# Altium PCB EC800M AUDIO V1.1.PcbDoc
Units mm, origin at the board's own origin, x right, y up, seen from the top; angles counter-clockwise.
Board outline 37.9 x 35.8 mm, 2 copper layers (Top Layer, Bottom Layer), stack 1.671 mm thick; 102 components, 74 nets, 360 pads, 245 vias.
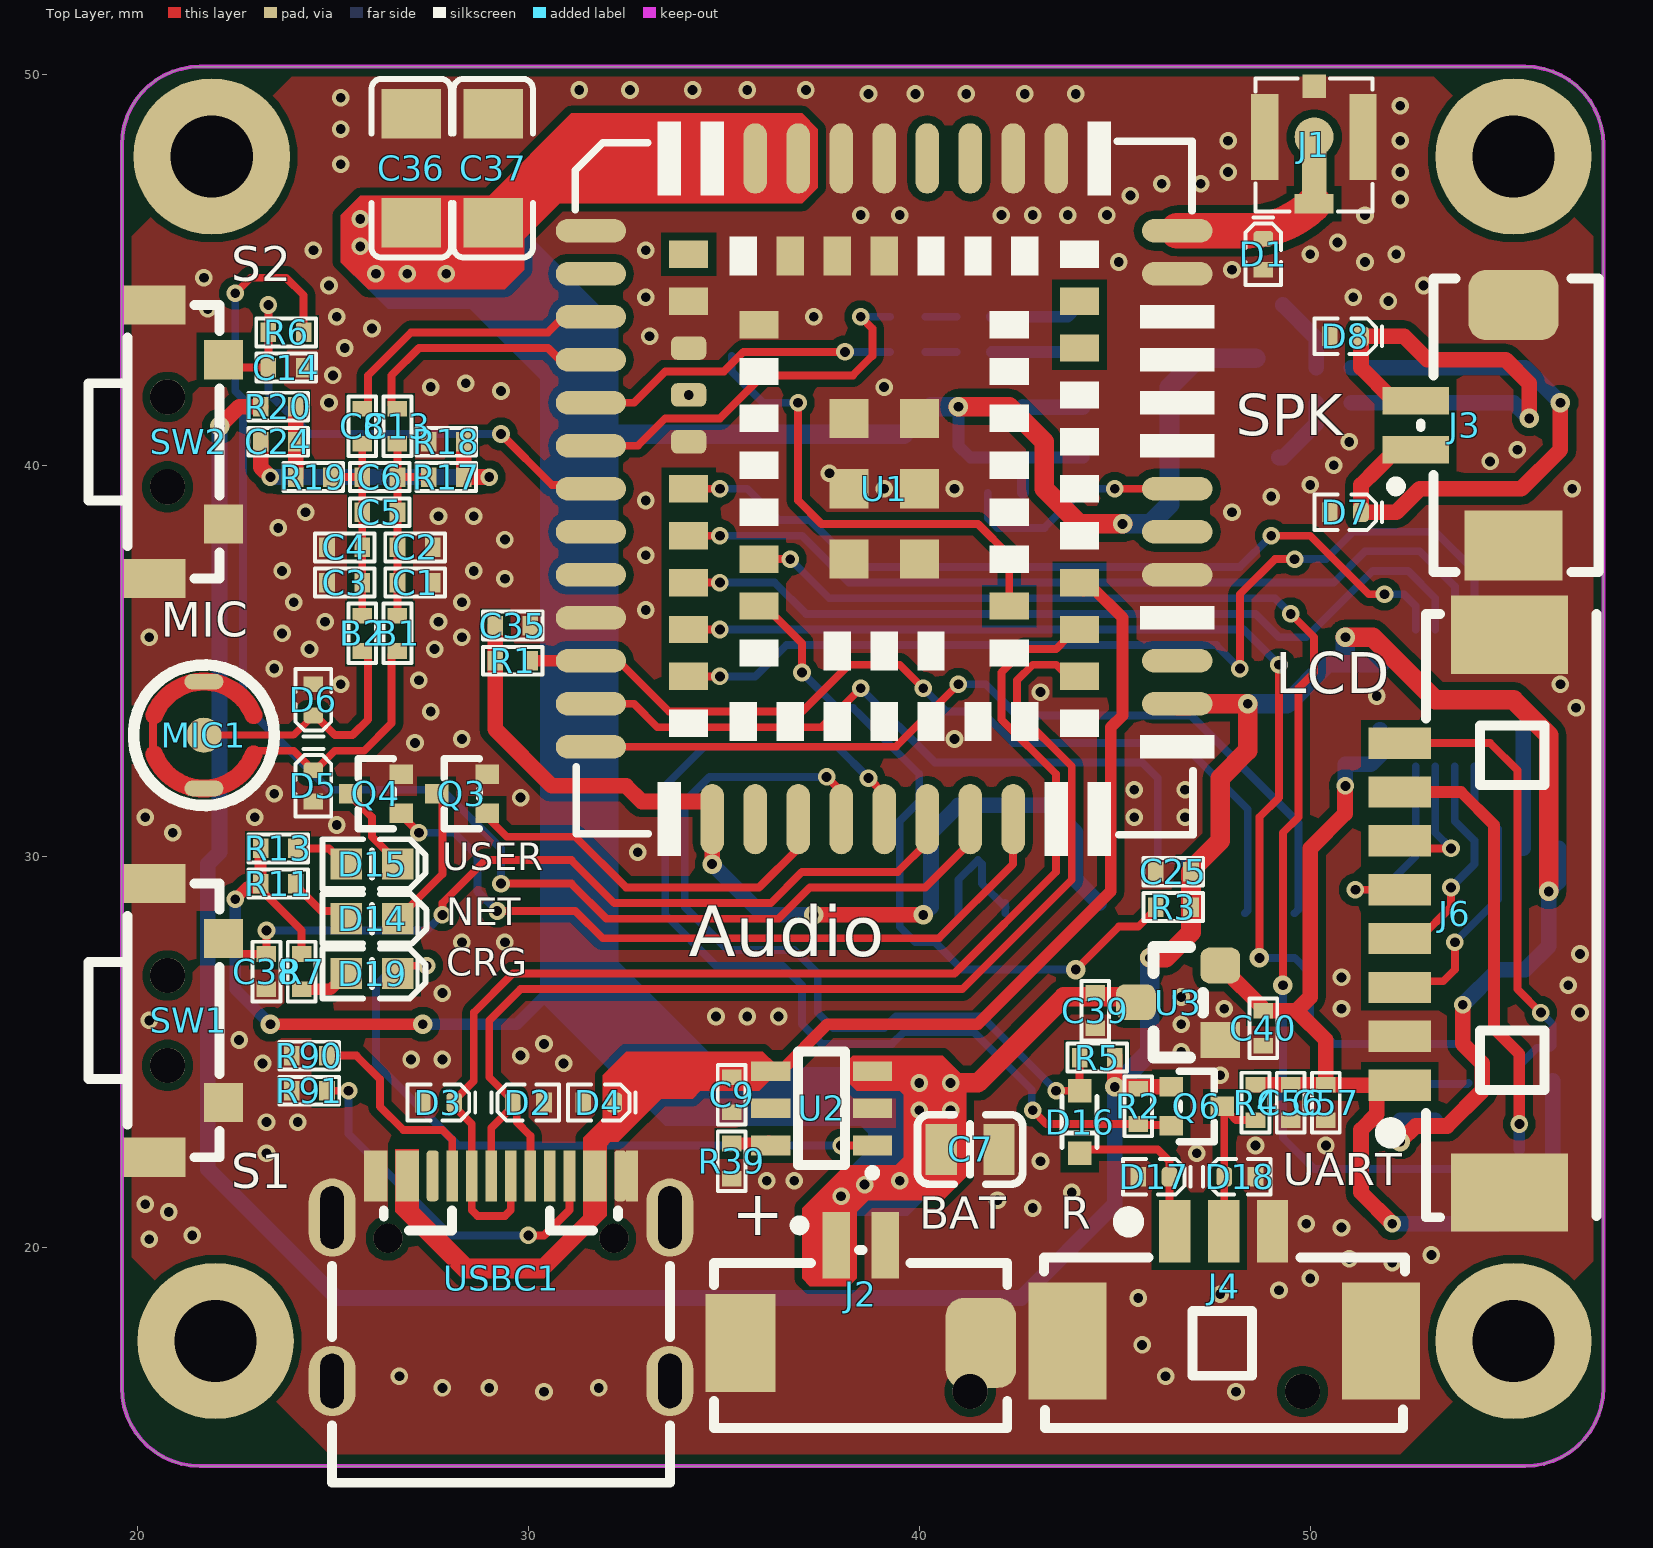
[diagram p0: Top Layer view]
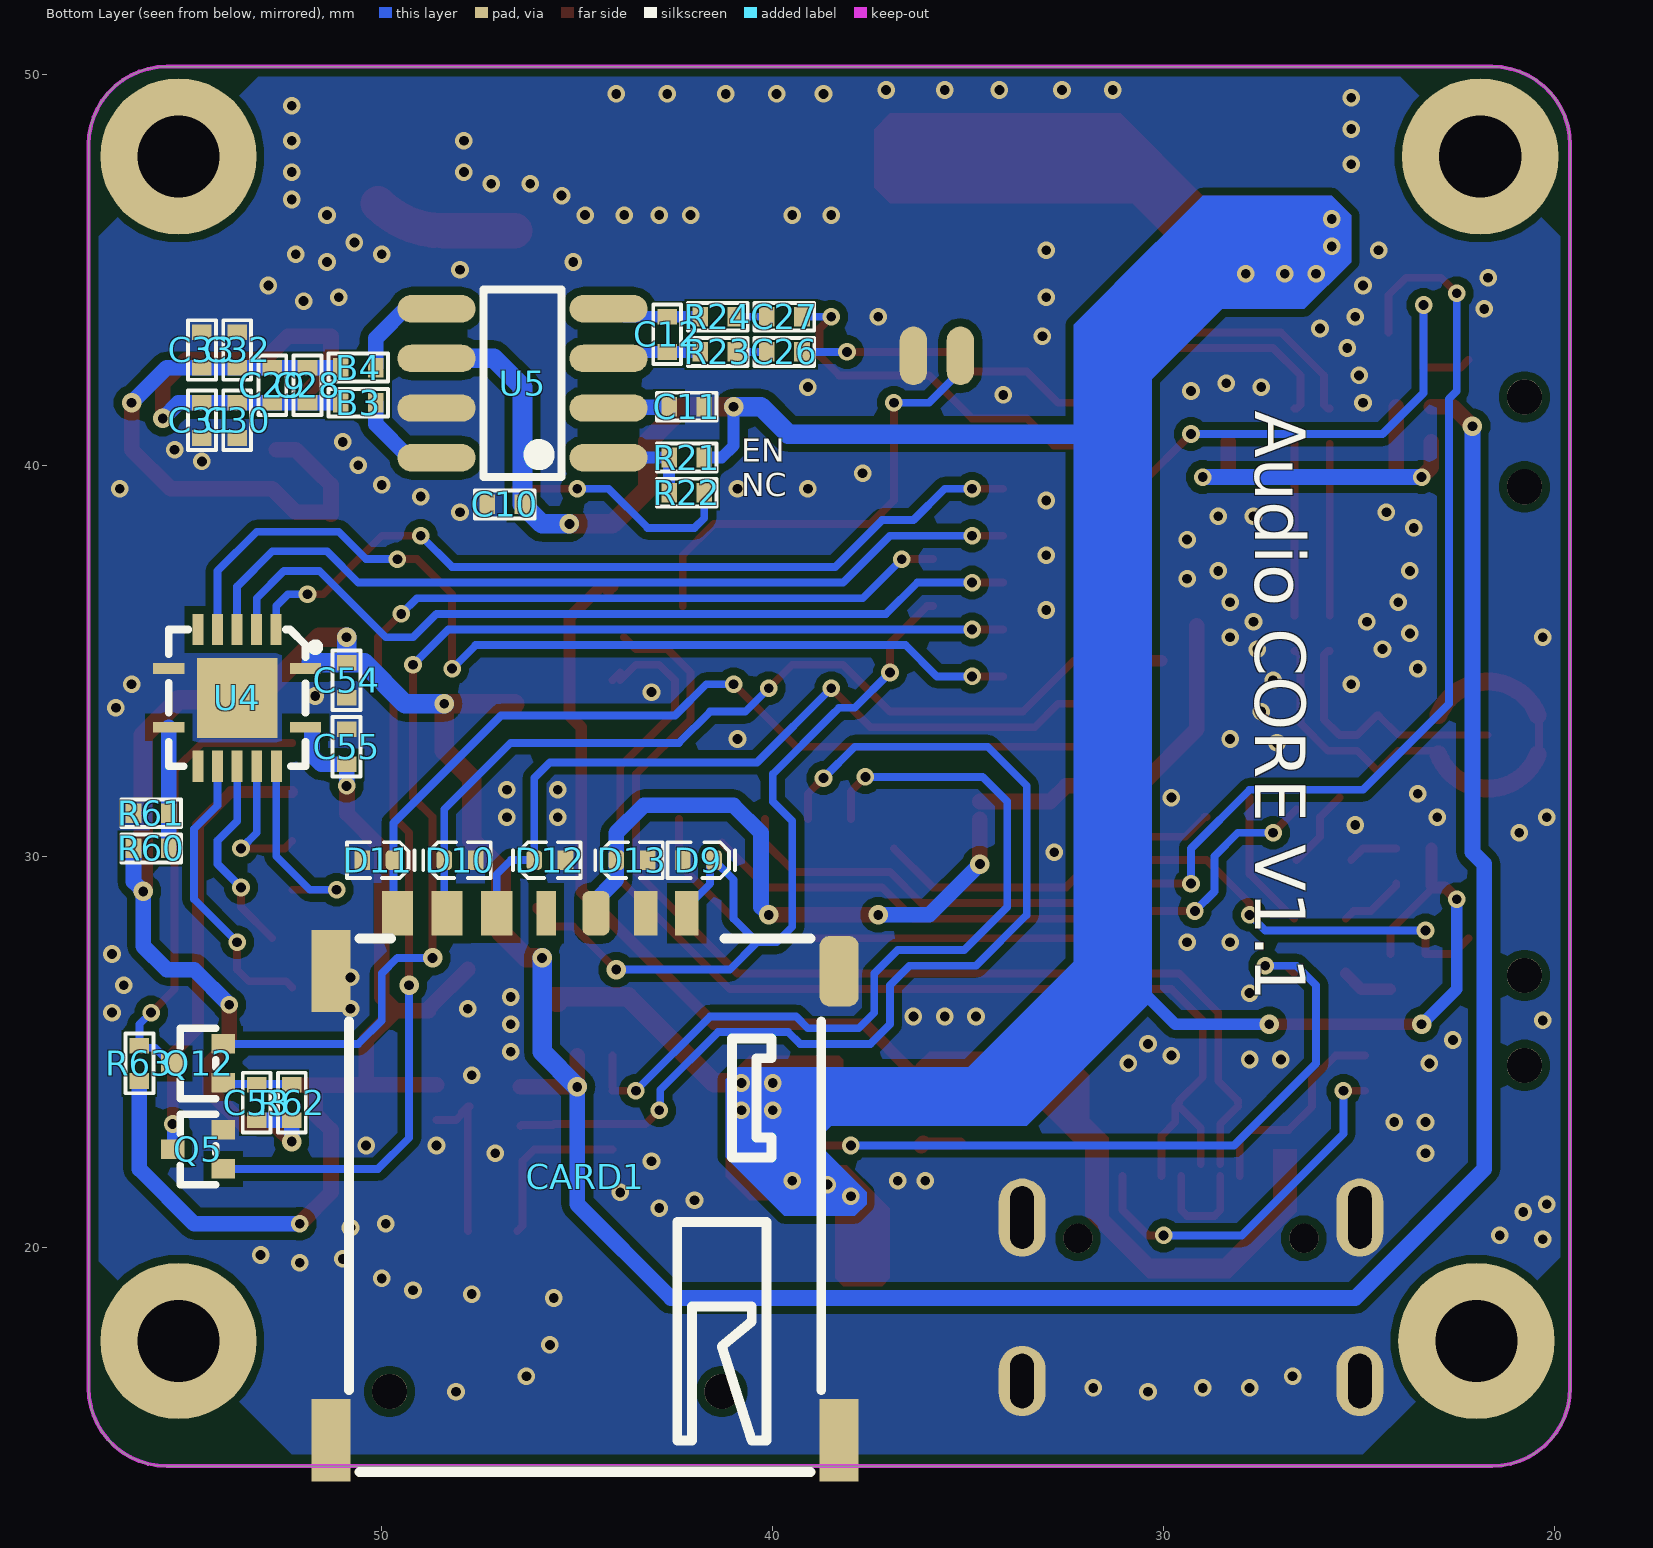
[diagram p1: Bottom Layer view, seen from below]

## Layer stack, top to bottom
Top Solder: solder mask 0.0102, Solder Resist, Dk 3.5
Top Layer: signal copper 0.0356
Dielectric1: core 1.6, FR-4, Dk 4.8
Bottom Layer: signal copper 0.0356
Bottom Solder: solder mask 0.0102, Solder Resist, Dk 3.5

## Board outline
19.6,16.4 19.6,48.2 cw(c21.6,48.2) 21.6,50.2 55.5,50.2 cw(c55.5,48.2) 57.5,48.2 57.5,16.4 cw(c55.5,16.4) 55.5,14.4 21.6,14.4 cw(c21.6,16.4)

## Design rules (kind name [scope] priority, off if disabled: settings)
Clearance [All] p1: gap=0.2 ignorepadtopadclearanceinfootprint=FALSE except(0: Arc-Hole Track-Hole SMDPad-Hole THPad-Hole Via-Hole Fill-Hole Poly-Hole Region-Hole Text-Hole)
DiffPairsRouting DiffPair_DiffPairsRouting [InDifferentialPair ('BC26USB')] p1: maxlimit=0.254 minlimit=0.2 mostfreqgap=0.2 toplayer_minwidth=0.381 toplayer_maxwidth=0.381 toplayer_prefwidth=0.381 bottomlayer_minwidth=0.381 bottomlayer_maxwidth=0.381 bottomlayer_prefwidth=0.381 maxuncoupledlength=12.7
DiffPairsRouting [InDifferentialPairClass('All Differential Pairs')] p2: maxlimit=0.254 minlimit=0.2 mostfreqgap=0.2 toplayer_minwidth=0.381 toplayer_maxwidth=0.381 toplayer_prefwidth=0.381 bottomlayer_minwidth=0.381 bottomlayer_maxwidth=0.381 bottomlayer_prefwidth=0.381 maxuncoupledlength=12.7
FabricationTestPointUsage TestPointUsage [All] p1: valid=0 allowmultiple=FALSE
FabricationTestpoint Testpoint [(IsPad And (OnTopLayer Or OnBottomLayer))] p1: side=3 testpointundercomponent=TRUE minsize=1.016 maxsize=2.54 preferedsize=1.524 minholesize=0 maxholesize=1.016 preferedholesize=0.813 testpointgrid=0.025 allowsidetop=TRUE allowsidebottom=TRUE usegrid=TRUE gridtolerance=0
HoleToHoleClearance [All] p1: gap=0.2 allowstackedmicrovias=TRUE
MatchedLengths DiffPair_MatchedLengths [InDifferentialPair ('BC26USB')] p1: tolerance=25.4 checknetsindiffpair=FALSE checkdiffpairvsdiffpair=TRUE checkxsignals=TRUE checkothers=TRUE
MinimumSolderMaskSliver [All] p1: minsoldermaskwidth=0.2
PlaneConnect [All] p1: planeconnectstyle=Direct reliefexpansion=0.508 reliefentries=4 reliefconductorwidth=0.254 reliefairgap=0.254
PolygonConnect [All] p1: connectstyle=Direct reliefconductorwidth=0.254 reliefentries=4 polygonreliefangle="90 Angle" airgapwidth=0.254
RoutingVias [All] p1: holewidth=0.25 width=0.45 viastyle="Through Hole" minholewidth=0.25 minwidth=0.45 maxholewidth=1 maxwidth=2
SilkToSilkClearance [All] p1: silktosilkclearance=0.2
SilkToSolderMaskClearance SilkscreenOverComponentPads [IsPad] p1: minsilkscreentomaskgap=0.2 clearancetoexposedcopper=TRUE
SolderMaskExpansion [All] p1: expansion=0.02 istentingtop=FALSE
Width [All] p1: maxlimit=5 minlimit=0.2 preferedwidth=0.2
22 further rules are at their usual default settings.

## Classes and differential pairs
component class LCD: C53 C54 C55 C56 C57 D16 D17 D18 J4 J6 Q5 Q6 Q12 R2 R4 R5 R60 R61 R62 R63 U4
component class AUDIO: B1 B2 B3 B4 C1 C2 C3 C4 C5 C6 C8 C10 C11 C12 C13 C24 C26 C27 C28 C29 C30 C31 C32 C33 D5 D6 D7 D8 J3 MIC1 R17 R18 R19 R20 R21 R22 R23 R24 U5
component class EC800X: C14 C25 C35 C36 C37 C38 CARD1 D1 D9 D10 D11 D12 D13 D14 D15 J1 Q3 Q4 R1 R3 R6 R11 R13 SW1 SW2 U1 U?
component class POWER: ANT2 C7 C9 C39 C40 C52 D2 D3 D4 D19 J2 M1 M2 R7 R39 R90 R91 U2 U3 USBC1

## Components (designator, comment, footprint, x,y, rotation, side; value= is the part's Value field where it differs from the comment)
B1 "PZ1005U121-1R0TF" 0402R 26.65,35.7 r90 top
B2 "PZ1005U121-1R0TF" 0402R 25.75,35.7 r90 top
B3 "PZ1005U121-1R0TF" 0402R 50.6,41.6 r0 bottom
B4 "PZ1005U121-1R0TF" 0402R 50.6,42.5 r0 bottom
C1 "22pF" 0402C 27.1,37 r0 top value=33pF
C2 "10pF" 0402C 27.1,37.9 r0 top value=33pF
C3 "22pF" 0402C 25.3,37 r0 top value=33pF
C4 "10pF" 0402C 25.3,37.9 r0 top value=33pF
C5 "22pF" 0402C 26.2,38.8 r0 top value=33pF
C6 "10pF" 0402C 26.2,39.7 r0 top value=33pF
C7 "47uF 6.3V" 0805C 41.3,22.5 r180 top value=1uF
C8 "0.1uF" 0402C 25.75,41 r270 top
C9 "4.7uF" 0402C 35.2,23.9 r90 top value=1uF
C10 "4.7uF" 0402C 46.85,39 r0 bottom value=0.1uF
C11 "1uF" 0402C 42.2,41.5 r0 bottom
C12 "22pF" 0402C 42.7,43.35 r90 bottom
C13 "0.1uF" 0402C 26.65,41 r270 top
C14 "0.1uF" 0402C 23.8,42.5 r180 top
C24 "10uF" 0402C 23.6,40.6 r0 top
C25 "1uF" 0402C 46.5,29.6 r0 top
C26 "0.1uF" 0402C 39.7,42.9 r0 bottom
C27 "0.1uF" 0402C 39.7,43.8 r0 bottom
C28 "10pF" 0402C 51.9,42.05 r270 bottom value=33pF
C29 "22pF" 0402C 52.8,42.05 r270 bottom value=33pF
C30 "10pF" 0402C 53.7,41.15 r270 bottom value=33pF
C31 "22pF" 0402C 54.6,41.15 r270 bottom value=33pF
C32 "10pF" 0402C 53.7,42.95 r270 bottom value=33pF
C33 "22pF" 0402C 54.6,42.95 r270 bottom value=33pF
C35 "0.1uF" 0402C 29.6,35.9 r0 top
C36 "100uF 6.3V" 1206C 27,47.6 r90 top
C37 "100uF 6.3V" 1206C 29.1,47.6 r90 top
C38 "0.1uF" 0402C 23.3,27.05 r90 top
C39 "1uF" 0402C 44.5,26.05 r90 top
C40 "1uF" 0402C 48.8,25.6 r90 top
C53 "1nF" 0402C 53.2,23.7 r90 bottom value=0.1uF
C54 "0.1uF" 0402C 50.9,34.5 r90 bottom
C55 "0.1uF" 0402C 50.9,32.8 r90 bottom
C56 "4.7uF" 0402C 49.5,23.7 r90 top value=2.2uF
C57 "0.1uF" 0402C 50.4,23.7 r90 top
CARD1 "SMN-303" SIM-SMD_SMN-303 44.8,21.8 r180 bottom locked
D1 "SLPESD0402M24" SOD-882_L1.0-W0.6-RD 48.8,45.4 r270 top
D2 "LESD8LL5.0T5G" SOD-882_L1.0-W0.6-RD 30,23.7 r0 top
D3 "LESD8LL5.0T5G" SOD-882_L1.0-W0.6-RD 27.7,23.7 r180 top
D4 "LESD8LL5.0T5G" SOD-882_L1.0-W0.6-RD 31.8,23.7 r180 top
D5 "LESD8LL5.0T5G" SOD-882_L1.0-W0.6-RD 24.5,31.8 r270 top
D6 "LESD8LL5.0T5G" SOD-882_L1.0-W0.6-RD 24.5,34 r90 top
D7 "LESD8LL5.0T5G" SOD-882_L1.0-W0.6-RD 50.9,38.8 r180 top
D8 "LESD8LL5.0T5G" SOD-882_L1.0-W0.6-RD 50.9,43.3 r180 top
D9 "LESD8LL5.0T5G" SOD-882_L1.0-W0.6-RD 41.9,29.9 r0 bottom
D10 "LESD8LL5.0T5G" SOD-882_L1.0-W0.6-RD 48,29.9 r180 bottom
D11 "LESD8LL5.0T5G" SOD-882_L1.0-W0.6-RD 50.1,29.9 r0 bottom
D12 "LESD8LL5.0T5G" SOD-882_L1.0-W0.6-RD 45.7,29.9 r180 bottom
D13 "LESD8LL5.0T5G" SOD-882_L1.0-W0.6-RD 43.6,29.9 r180 bottom
D14 "XL-1608UGC-04" LED-0603_GR 26,28.4 r0 top value=绿灯
D15 "XL-1608SURC-06" LED-0603_RD 26,29.8 r0 top value=红灯
D16 "RB521S-30" SOD-523_L1.2-W0.8-LS1.6-RD 44.1,23.2 r90 top
D17 "LESD8LL5.0T5G" SOD-882_L1.0-W0.6-RD 46,21.8 r180 top
D18 "LESD8LL5.0T5G" SOD-882_L1.0-W0.6-RD 48.2,21.8 r0 top
D19 "XL-2012UBC" LED-0603_RD 26,27 r0 top value=蓝灯
J1 "ANT" IPEX天线 50.1,48.4 r90 top
J2 "WAFER-MX1.25-2PWB" CONN-SMD_2P-P1.25_XUNPU_WAFER-MX1.25-2PWB 38.5,18.8 r0 top locked
J3 "WAFER-MX1.25-2PWB" CONN-SMD_2P-P1.25_XUNPU_WAFER-MX1.25-2PWB 53.95,41.025 r90 top locked
J4 "HC-1.25-3PWT" "MX 1.25-WS-3P" 47.8,17.6 r0 top locked
J6 "Header 8" "MX 1.25-WS-8P" 55.1,28.532 r90 top locked
MIC1 "B4013AM423-092" MIC-SMD_BD4.0_B4013AM423-008 21.7,33.1 r0 top locked
Q3 "DTC143ZE" SOT-523 28.3,31.6 r0 top
Q4 "DTC143ZE" SOT-523 26.1,31.6 r0 top
Q5 "DTC143ZE" SOT-523 54.7,22.5 r180 bottom
Q6 "HXY1012CI" SOT-523 47.1,23.6 r180 top
Q12 "MMBT3904T" SOT-523 54.7,24.7 r180 bottom
R1 "10K" 0402R 29.6,35 r0 top
R2 "4.7K" 0402R 45.6,23.6 r270 top value=10K
R3 "51K" 0402R 46.5,28.7 r0 top
R4 "4.7K" 0402R 48.6,23.7 r270 top value=10K
R5 "4.7K" 0402R 44.55,24.85 r180 top value=10K
R6 "0R" 0402R 23.8,43.4 r180 top
R7 "2.2K" 0402R 24.2,27.05 r90 top
R11 "4.7K" 0402R 23.6,29.3 r180 top
R13 "4.7K" 0402R 23.6,30.2 r180 top
R17 "1.5K" 0402R 27.9,39.7 r0 top
R18 "1K" 0402R 27.9,40.6 r180 top
R19 "1.5K" 0402R 24.5,39.7 r0 top
R20 "1K" 0402R 23.6,41.5 r0 top
R21 "NC 10K" 0402R 42.2,40.2 r180 bottom
R22 "0R" 0402R 42.2,39.3 r0 bottom
R23 "10K" 0402R 41.4,42.9 r0 bottom
R24 "10K" 0402R 41.4,43.8 r0 bottom
R39 "2.7K" 0402R 35.2,22.2 r270 top
R60 "10K" 0402R 55.9,30.2 r180 bottom
R61 "100K" 0402R 55.9,31.1 r0 bottom
R62 "4.7K" 0402R 52.3,23.7 r90 bottom value=10K
R63 "10K" 0402R 56.2,24.7 r90 bottom
R90 "4.7K" 0402R 24.4,24.9 r180 top
R91 "4.7K" 0402R 24.4,24 r180 top
SW1 "TS-1101VS-C-A-A" KEY-SMD_TS-1101VS-C-A-A 21.4,25.8 r90 top locked
SW2 "TS-1101VS-C-A-A" KEY-SMD_TS-1101VS-C-A-A 21.4,40.6 r90 top locked
U1 "EC800E-CN" "EC801E-CN - 03" 39.1,39.4 r0 top locked
U2 "ME4055AM6G-N" SOT-23-6PIN 38.8,22.6 r180 top locked
U3 "XC6206P332MR" SOT-23 46.621,26.253 r180 top
U4 "TXS0104ERGYR" VQFN-14_L3.5-W3.5-P0.50-BL-EP 53.698,34.05 r0 bottom locked
U5 "NS4150C" SOIC-8_150MIL_NS4150C 46.4,42.1 r90 bottom locked
USBC1 "USB3.1C16PFSMT" USB-C-SMD_TYPE-C-USB-17 29.3,19.2 r0 top locked

## Footprints (in the part's own frame and the unit in brackets; to place one, negate y for a bottom-side part, rotate by r counter-clockwise, add the part's x,y. Pads: shape width x height; smd on the part's side, far side on the other; paste and mask are expansions set on the pad)
0402C [mm]
  rect 0.4x0.5 smd mask+0.025: 1(-0.45,0) 2(0.45,0)
  silkscreen extent -0.76,-0.36 0.76,0.36
0402R [mm]
  rect 0.4x0.5 smd mask+0.025: 1(-0.45,0) 2(0.45,0)
  silkscreen extent -0.76,-0.36 0.76,0.36
0805C [mm]
  rect 0.8x1.3 smd: 1(-0.737,0) 2(0.737,0)
  silkscreen extent -1.35,-0.89 1.35,0.89
1206C [mil]
  rect 50x60 smd: 1(-55,0) 2(55,0)
  silkscreen extent -90,-40 90,40
CONN-SMD_2P-P1.25_XUNPU_WAFER-MX1.25-2PWB [mm]
  rect 0.7x1.7 smd paste+0 mask+0.05: 1(-0.625,1.25) 2(0.625,1.25)
  rrect50% 1.8x2.3 smd paste+0 mask+0.05: 3(3.075,-1.25)
  rect 1.8x2.5 smd paste+0 mask+0.05: 4(-3.075,-1.25)
  silkscreen extent -3.75,-3.43 3.75,1.88
"EC801E-CN - 03" [mm]
  oval 1.8x0.6 smd: 1(-7.5,6.6) 2(-7.5,5.5) 3(-7.5,4.4) 4(-7.5,3.3) 5(-7.5,2.2) 6(-7.5,1.1) 7(-7.5,0) 8(-7.5,-1.1) 9(-7.5,-2.2) 10(-7.5,-3.3) 11(-7.5,-4.4) 12(-7.5,-5.5) 13(-7.5,-6.6) 24(7.5,-5.5) 25(7.5,-4.4) 27(7.5,-2.2) 28(7.5,-1.1) 29(7.5,0) 34(7.5,5.5) 35(7.5,6.6)
  oval 0.6x1.8 smd: 14(-4.4,-8.45) 15(-3.3,-8.45) 16(-2.2,-8.45) 17(-1.1,-8.45) 18(0,-8.45) 19(1.1,-8.45) 20(2.2,-8.45) 21(3.3,-8.45) 36(4.4,8.45) 37(3.3,8.45) 38(2.2,8.45) 39(1.1,8.45) 40(0,8.45) 41(-1.1,8.45) 42(-2.2,8.45) 43(-3.3,8.45)
  rect 1x0.7 smd: 45(-5,4.8) 49(-5,0) 50(-5,-1.2) 51(-5,-2.4) 52(-5,-3.6) 53(-5,-4.8) 59(5,-4.8) 60(5,-3.6) 61(5,-2.4) 66(5,3.6) 67(5,4.8) 73(-3.2,4.2) 78(-3.2,-1.8) 79(-3.2,-3) 82(3.2,-3)
  rrect50% 0.9x0.6 smd: 46(-5,3.6) 47(-5,2.4) 48(-5,1.2)
  rect 0.7x1 smd: 70(0,5.95) 71(-1.2,5.95) 72(-2.4,5.95)
  rect 1x1 smd: 89(-0.9,1.8) 90(0.9,1.8) 91(-0.9,0) 92(0.9,0) 93(-0.9,-1.8) 94(0.9,-1.8)
  rect 1x0.7 smd mask+0.05: 99(-5,6)
  silkscreen extent -7.9,-9.4 8.45,9.4
IPEX天线 [mm] "IPEX天线 4PIN"
  rect 0.5x1 smd: 1(-1.705,0.004)
  rect 1.5x0.62 smd: 1(-0.89,0)
  round 1 smd: 1(0,0)
  rect 2.2x0.7 smd: 2(-0.005,1.26) 2(-0.005,-1.25)
  rect 0.6x0.6 smd: 3(1.3,0)
  silkscreen extent -1.9,-1.5 1.5,1.5
KEY-SMD_TS-1101VS-C-A-A [mm]
  round 0.9 hole 0.9 unplated: 0(-1.15,0.631) 0(1.15,0.631)
  rect 1x1 smd: 1(-2.1,-0.8) 2(2.1,-0.8)
  rect 1x1.6 smd: 3(-3.5,0.974) 4(3.5,0.974)
  silkscreen extent -3.5,-0.7 3.5,2.65
LED-0603_GR [mm]
  rect 0.8x0.8 smd: 1(-0.66,0) 2(0.66,0)
  silkscreen extent -1.27,-0.64 1.4,0.64
LED-0603_RD [mm]
  rect 0.8x0.8 smd: 1(-0.66,0) 2(0.66,0)
  silkscreen extent -1.27,-0.64 1.37,0.64
MIC-SMD_BD4.0_B4013AM423-008 [mm]
  round 0.9 smd: 1(0,-0.004)
  oval 1x0.4 smd: 2(0,-1.367) 2(0,1.367)
  Top Layer region: 189 vertices and 0 holes, not listed, extent -1.495,0.287 1.495,1.592
  Top Layer region: 190 vertices and 0 holes, not listed, extent -1.495,-1.591 1.495,-0.272
  silkscreen extent -1.8,-1.8 1.8,1.79
"MX 1.25-WS-3P" [mm] "长：8.9mm，宽：4.2mm，高：3.4mm"
  rect 2x3 smd: 0(-4.007,0) 0(4.007,0)
  rect 0.8x1.6 smd: 1(-1.264,2.811) 2(-0.014,2.811) 3(1.236,2.811)
  silkscreen extent -4.61,-2.23 4.62,3.25
"MX 1.25-WS-8P" [mm] "长：15.15mm，宽：4.2mm，高：3.4mm"
  rect 2x3 smd: 0(-7.132,0) 0(7.132,0)
  rect 0.8x1.6 smd: 1(-4.389,2.811) 2(-3.139,2.811) 3(-1.889,2.811) 4(-0.639,2.811) 5(0.611,2.811) 6(1.861,2.811) 7(3.111,2.811) 8(4.361,2.811)
  silkscreen extent -7.77,-2.23 7.67,3.25
SIM-SMD_SMN-303 [mm]
  rect 1x2.1 smd: 8(-6.5,5.26) 10(6.5,-6.74) 11(-6.5,-6.74)
  rrect50% 1x1.8 smd: 9(6.5,5.26)
  rrect50% 0.7x1.14 smd: C1(0.28,6.74)
  rect 0.8x1.14 smd: C2(-2.26,6.74) C3(-4.8,6.74) C7(-3.53,6.74)
  rect 0.6x1.14 smd: C5(1.55,6.74) CD(2.6,6.74)
  rect 0.5x1.14 smd: C6(-0.99,6.74)
  round 0.9 hole 0.9 unplated: ""(-5,-5.49) ""(3.5,-5.49)
  silkscreen extent -6.04,-7.55 6.04,6.1
SOD-523_L1.2-W0.8-LS1.6-RD [mm]
  rect 0.6x0.6 smd: 1(-0.8,0) 2(0.8,0)
  silkscreen extent -0.65,-0.45 0.65,0.45
SOD-882_L1.0-W0.6-RD [mm]
  rrect50% 0.4x0.5 smd: 1(-0.4,0)
  rect 0.4x0.5 smd: 2(0.4,0)
  silkscreen extent -0.94,-0.46 0.79,0.46
SOIC-8_150MIL_NS4150C [mm]
  oval 0.7x2 smd: 1(-1.905,-2.2) 2(-0.635,-2.2) 3(0.635,-2.2) 4(1.905,-2.2) 5(1.905,2.2) 6(0.635,2.2) 7(-0.635,2.2) 8(-1.905,2.2)
  silkscreen extent -2.4,-1 2.4,1
SOT-23 [mil]
  rect 40x36 smd: 1(-42.5,37.5)
  rrect50% 40x36 smd: 2(-42.5,-37.5) 3(42.5,-0.5)
  silkscreen extent -25,-56 25,55
SOT-23-6PIN [mm]
  rect 1x0.5 smd: 1(0,0) 2(0,-0.95) 3(0,-1.9) 4(2.6,-1.9) 5(2.6,-0.95) 6(2.6,0)
  silkscreen extent -0.1,-2.4 1.9,0.8
SOT-523 [mm]
  rect 0.6x0.5 smd: 1(0.65,-0.5) 2(0.65,0.5) 3(-0.65,0)
  silkscreen extent -0.45,-0.9 0.45,0.9
USB-C-SMD_TYPE-C-USB-17 [mm]
  oval 1.2x1.8 hole 0.6 slot 1.4 at 90 deg: 0(-4.32,-2.624) 0(4.32,-2.624)
  oval 1.2x2 hole 0.6 slot 1.6 at 90 deg: 0(-4.32,1.556) 0(4.32,1.556)
  rect 0.3x1.3 smd: A1(-3.35,2.623) A4(-2.55,2.623) A5(-1.25,2.623) A6(-0.25,2.623) A7(0.25,2.623) A9(2.55,2.623) A12(3.35,2.623) B4(2.25,2.623) B5(1.75,2.623) B6(0.75,2.623) B7(-0.75,2.623) B8(1.25,2.624) B9(-2.25,2.623) B12(-3.05,2.623)
  rrect50% 0.3x1.3 smd: A8(-1.75,2.624) B1(3.05,2.623)
  round 0.75 hole 0.75 unplated: ""(-2.89,1.026) ""(2.89,1.026)
  silkscreen extent -4.32,-5.23 4.32,1.74
VQFN-14_L3.5-W3.5-P0.50-BL-EP [mm]
  rect 0.8x0.28 smd paste-100 mask+0.051: 1(-1.75,-0.75) 7(1.75,-0.75) 8(1.75,0.75) 14(-1.75,0.75)
  rect 0.28x0.8 smd paste-100 mask+0.051: 2(-0.998,-1.75) 3(-0.498,-1.75) 4(0.002,-1.75) 5(0.502,-1.75) 6(1.002,-1.75) 9(1,1.75) 10(0.5,1.75) 11(0,1.75) 12(-0.5,1.75) 13(-1,1.75)
  rect 2.05x2.05 smd paste-100 mask+0.051: 15(0,0)
  silkscreen extent -2.1,-1.75 1.75,1.75

## Part data
B1 B2 B3 B4: "磁珠", Current Rating=1A, DC Resistance=120mΩ, Impedance @ Frequency=120Ω@100MHz, JLCPCB Part Class="Extended Part", LCSC Part Name="单路 0402磁珠 阻抗120Ω@100MHz", Manufacturer=Sunlord(顺络), Tolerance=±25%, Add into BOM=yes, Circuits=1, Convert to PCB=yes, Datasheet=https://atta.szlcsc.com/upload/public/pdf/source/20241120/56CFDC78F74CEDC225A629A43232883A.pdf, Device=PZ1005U121-1R0TF, Manufacturer Part=PZ1005U121-1R0TF, Supplier=LCSC, Supplier Footprint=0402, Supplier Part=C96723, Symbol=PZ1005U121-1R0TF
C1 C2 C3 C4 C5 C6 C7 C8 C9 C10 C11 C12 C13 C14 C24 C25 C26 C27 C28 C29 C30 C31 C32 C33 C35 C36 C37 C38 C39 C40 C53 C54 C55 C56 C57: library part Cap, "Capacitor", LatestRevisionDate=17-Jul-2002, LatestRevisionNote="Re-released for DXP Platform.", PackageReference=RAD-0.3, Published=8-Jun-2000, Publisher="Altium Limited"
CARD1: "SIM CARD", BOM_Manufacturer=XUNPU, BOM_Manufacturer Part=SMN-303, BOM_Supplier=LCSC, BOM_Supplier Part=C266888, Contributor=LCSC, spicePre=C, spiceSymbolName=SMN-303
D1: library part LESD8LL5.0T5G, "ESD", BOM_JLCPCB Part Class="Extended Part", BOM_Manufacturer=LRC, BOM_Manufacturer Part=SLPESD0402M24, BOM_Supplier=LCSC, BOM_Supplier Part=C513483, Contributor=LCSC, spicePre=D, spiceSymbolName=LESD8LL5.0T5G
D2 D3 D4 D5 D6 D7 D8 D9 D10 D11 D12 D13 D17 D18: "ESD", BOM_JLCPCB Part Class="Extended Part", BOM_Manufacturer=LRC, BOM_Manufacturer Part=LESD8LL5.0T5G, BOM_Supplier=LCSC, BOM_Supplier Part=C172423, Contributor=LCSC, spicePre=D, spiceSymbolName=LESD8LL5.0T5G
D14 D15 D19: library part LED0, "Typical INFRARED GaAs LED", LatestRevisionDate=08-Jul-2005, LatestRevisionNote="Mech Layer 1 removed.", PackageReference=LED-0, Published=8-Jun-2000, Publisher="Altium Limited"
D16: library part 1N4148WT_C727112, "DIODE", Average Rectified Current (Io)=100mA, Forward Voltage (Vf@If)="1.25V 150mA", JLCPCB Part Class="Extended Part", Manufacturer=TWGMC(台湾迪嘉), Operating Temperature (Max)="+150℃ (Tj)", Operating Temperature (Min)="-65℃ (Tj)", Power Dissipation=150mW, Reverse Leakage Current="1uA 75V", Reverse Voltage (Vr)=75V, Add into BOM=yes, Convert to PCB=yes, Datasheet=https://atta.szlcsc.com/upload/public/pdf/source/20200828/C727112_FCA71CBB186A515518FBD85DA79D41CF.pdf, Device=RB521S-30, Diode Configuration=独立式, LCSC Part Name=RB521S-30, Manufacturer Part=RB521S-30, Name=RB521S-30, Reverse Recovery Time (trr)=4ns, Supplier=LCSC, Supplier Footprint=SOD-523, Supplier Part=C727120, Symbol=RB521S-30
J1: "Antenna"
J2 J3: "WAFER", Color=米色, Current Rating=1A, Flame Retardant Rating=-, JLCPCB Part Class="Extended Part", LCSC Part Name="1x2P 间距:1.25mm 卧贴 系列:PicoBlade(MX 1.25)", Manufacturer=XUNPU(讯普), Operating Temperature=-25℃~+85℃, Voltage Rating=125V, Add into BOM=yes, Contact Material=黄铜, Contact Plating=-, Convert to PCB=yes, Datasheet=https://atta.szlcsc.com/upload/public/pdf/source/20220527/5ACBB683E384B6AD06743F272F933620.pdf, Device=WAFER-MX1.25-2PWB, Manufacturer Part=WAFER-MX1.25-2PWB, Mounting Type=卧贴, Number of Pins=2P, Number of PINs Per Row=2, Number of Rows=1, Pins Structure=1x2P, Pitch=1.25mm, Plastic Material=LCP, Reference Series="PicoBlade(MX 1.25)", Row Spacing=-, Supplementary Features=辅助焊脚, Supplier=LCSC, Supplier Footprint=SMD,P=1.25mm,卧贴, Supplier Part=C3029359, Symbol=WAFER-MX1.25-2PWB, X-Length of Bottom Edge on Board (Spacing Line)=7.5mm, Y-Width of Bottom Edge on Board=5.25mm, Z-Height of the Board=3.6mm
J4: "Connect", Colour=-, Current Rating (Max)=1A, Flame Retardant Rating=UL94V-0, JLCPCB Part Class="Extended Part", LCSC Part Name="1x3P 间距:1.25mm 卧贴 系列:PicoBlade(MX 1.25)", Manufacturer=HCTL(华灿天禄), Operating Temperature Range=-40℃~+105℃, Rated Voltage (Max)=125V, Add into BOM=yes, Contact Material=黄铜, Contact Plating=锡, Convert to PCB=yes, Datasheet=https://atta.szlcsc.com/upload/public/pdf/source/20240930/9508A8292CCC87B0C29E3A028D56E30A.pdf, Device=HC-1.25-3PWT, Manufacturer Part=HC-1.25-3PWT, Mounting Style=卧贴, Number of Pins=3P, Number of PINs Per Row=3, Number of Rows=1, Pins Structure=1x3P, Pitch=1.25mm, Plastic Material=LCP, Reference Series="PicoBlade(MX 1.25)", Row Spacing=-, Supplementary Features=辅助焊脚, Supplier=LCSC, Supplier Footprint=SMD,P=1.25mm,卧贴, Supplier Part=C2845380, Symbol=HC-1.25-3PWT, X-Length of Bottom Edge on Board (Spacing Line)=8.8mm, Y-Width of Bottom Edge on Board=5.25mm, Z-Height of the Board=3.57mm
J6: "Header, 8-Pin", LatestRevisionDate=17-Jul-2002, LatestRevisionNote="Re-released for DXP Platform.", Publisher="Altium Limited"
MIC1: library part GMI6050P-66DB, "MIC", BOM_Manufacturer=Goertek(歌尔), BOM_Manufacturer Part=B4013AM423-092, BOM_Supplier=LCSC, BOM_Supplier Part=C5160218, Contributor=LCSC, spicePre=M, spiceSymbolName=B4013AM423-092
Q3 Q4 Q5: library part DTC143ZE_C248787, "NPN", Collector Current (Ic)=100mA, Collector Cut-Off Current (Icbo)=100nA, Collector-Emitter Breakdown Voltage (Vceo)=50V, Collector-Emitter Saturation Voltage (VCE(sat)@Ic,Ib)=250mV@10mA,1mA, DC Current Gain (hFE@Ic,Vce)=350@10mA,5V, Input Resistor=4.7kΩ, Input Voltage (VI(off)@Ic,Vce)=-, JLCPCB Part Class="Extended Part", LCSC Part Name="电流:100mA 耐压:50V", Manufacturer=TC(德昌), Operating Temperature=-55℃~+150℃@(Tj), Power Dissipation (Pd)=150mW, Add into BOM=yes, Convert to PCB=yes, Datasheet=https://atta.szlcsc.com/upload/public/pdf/source/20180801/C261279_47256D58AC18E2E55271AE832C186250.pdf, Device=DTC143ZE_C248787, Input Voltage (VI(on)@Ic,Vce)=-, Manufacturer Part=DTC143ZE, Name=DTC143ZE, Output Voltage (VO(on)@Io/Ii)=-, Resistor Ratio=-, Supplier=LCSC, Supplier Footprint=SOT-523-3, Supplier Part=C248787, Symbol=DTC143ZE_C248787, Transistor Type=1个NPN-预偏置, Transition Frequency (fT)=-
Q6: "NMOS", Continuous Drain Current (Id)=800mA, Drain Source On Resistance (RDS(on)@Vgs,Id)=350mΩ@4.5V, Drain Source Voltage (Vdss)=20V, Gate Threshold Voltage (Vgs(th)@Id)=1V@250uA, Input Capacitance (Ciss@Vds)=50pF, LCSC Part Name="N沟道 耐压:20V 电流:800mA", Manufacturer="HXY MOSFET(华轩阳电子)", Power Dissipation (Pd)=150mW, Add into BOM=yes, Convert to PCB=yes, Datasheet=https://atta.szlcsc.com/upload/public/pdf/source/20221216/7678D929A4495F210F49E57C2201325F.pdf, Device=HXY1012CI, Manufacturer Part=HXY1012CI, Name=HXY1012CI, Supplier=LCSC, Supplier Footprint=SOT-523, Supplier Part=C5148644, Symbol=HXY1012CI, Type=N沟道
Q12: BOM_JLCPCB Part Class="Extended Part", BOM_Manufacturer=CJ, BOM_Manufacturer Part=MMBT3904T, BOM_Supplier=LCSC, BOM_Supplier Part=C61616, spicePre=Q, spiceSymbolName=MMBT3904T
R1 R2 R3 R4 R5 R6 R7 R11 R13 R17 R18 R19 R20 R21 R22 R23 R24 R39 R60 R61 R62 R63 R90 R91: library part Res2, "Resistor", LatestRevisionDate=17-Jul-2002, LatestRevisionNote="Re-released for DXP Platform.", PackageReference=AXIAL-0.4, Published=8-Jun-2000, Publisher="Altium Limited"
SW1 SW2: "SWITCH", Actuator/Cap Color=黑色, Contact Current=50mA, Insulation Resistance=-, JLCPCB Part Class="Extended Part", LCSC Part Name="7*2.5*3.5mm 卧贴 轻触开关", Manufacturer="XKB Connectivity(中国星坤)", Operating Force=260gf, Operating Temperature=-30℃~+85℃, Voltage Rating (DC)=12V, Actuator Style=矩形按钮, Add into BOM=yes, Circuit=单刀单掷, Convert to PCB=yes, Datasheet=https://atta.szlcsc.com/upload/public/pdf/source/20211011/3EC7F7473F2EE0EB3A7179674E79B771.pdf, Device=TS-1101VS-C-A-A, Manufacturer Part=TS-1101VS-C-A-A, Mechanical Life=5万次, Mounting Style=卧贴, Strike Gundam=不带, Supplier=LCSC, Supplier Footprint=SMD, Supplier Part=C318936, Switch Height=3.5mm, Switch Length=7mm, Switch Width=2.5mm, Symbol=TS-1101VS-C-A-A, With Lamp=无
U1: library part EC800G-CN, "EC800G-CN Moudle 109PIN 15.8X17.7mm H2.4mm RO", Manufacturer=Quectel, Geometry.Height=2.4mm, Part Description="EC800G-CN Moudle 109PIN 15.8X17.7mm H2.4mm RO", PCB Footprint=EC800G-CN
U2: library part HX4057A, "充电IC", BOM_LCSC Assembly=Yes, BOM_Manufacturer=MICRONE(南京微盟), BOM_Manufacturer Part=ME4055AM6G-N, BOM_Supplier=LCSC, BOM_Supplier Part=C82121, Contributor=LCSC, SMT Type=Extend, spicePre=U, spiceSymbolName=ME4055AM6G-N
U3: library part ME6203A50M3G, "LDO", Dropout Voltage=680mV@(50mA), JLCPCB Part Class="Extended Part", Manufacturer=MICRONE(南京微盟), Maximum Input Voltage=40V, Output Current=180mA, Output Voltage=5V, Power Supply Rejection Ratio (PSRR)=-, Add into BOM=yes, Convert to PCB=yes, Datasheet=https://atta.szlcsc.com/upload/public/pdf/source/20170622/1498103883286.pdf, Device=XC6206P332MR, LCSC Part Name=XC6206P332MR, Manufacturer Part=ME6203A50M3G, Name=ME6203A50M3G, Number of Outputs=1, Output Polarity=正, Output Type=固定, Supplier=LCSC, Supplier Footprint=SOT-23, Supplier Part=C347376, Symbol=XC6206P332MR
U4: "电平转换IC", JLCPCB Part Class="Extended Part", Manufacturer=TI(德州仪器), Add into BOM=yes, Convert to PCB=yes, Datasheet=https://www.ti.com/cn/lit/gpn/txs0104e, Device=TXS0104ERGYR, LCSC Part Name=TXS0104ERGYR, Manufacturer Part=TXS0104ERGYR, Supplier=LCSC, Supplier Footprint=VQFN-14-EP(3.5x3.5), Supplier Part=C154926, Symbol=TXS0104ERGYR
U5: library part NS4160, "Amplifier", BOM_Manufacturer="Shenzhen Nsiway Tech", BOM_Assembly Type=smtWeld, BOM_Manufacturer Part=NS4160, BOM_Paste Type=expand, BOM_Supplier=LCSC, BOM_Supplier Part=C219017, Contributor=LCSC, spicePre=U, spiceSymbolName=NS4160
USBC1: "USBC", BOM_Manufacturer=LCSC, BOM_Manufacturer Part=-, BOM_Supplier=LCSC, BOM_Supplier Part=C167321, Contributor=LCSC, spicePre=U, spiceSymbolName=USB3.1C16PFSMT

## Free pads (board coordinates)
  round 4 hole 2.1: 0(21.9,47.9) 0(22,17.6) 0(55.2,17.6) 0(55.2,47.9)
  oval 0.7x1.5 smd far side: 2(35.2,42.8) 2(36.4,42.8)

## Via types
v1: diameter 0.45, hole 0.25, Top Layer to Bottom Layer, tented both sides, 226 vias
v2: diameter 0.5, hole 0.25, Top Layer to Bottom Layer, tented both sides, 19 vias

## Nets (pads, with @x,y where several pads share a name; then routed paths per layer and width w, separated by ;. In a path a pad name is that pad's centre, name@x,y a point inside that pad or via, vN(x,y) a via of type N, cw(c..) or ccw(c..) an arc to the next point about the centre after c; other vN are vias at no path point)
BLK: J6.7 Q5.3 | length 11.3
  Top Layer w0.3: J6.7 53.857,31.643 54.7,30.8 54.7,25.6 55.35,24.95 v1(55.35,23.15)
  Bottom Layer w0.3: Q5.3 v1(55.35,23.15)
CC1: R90.1 USBC1.A5 | length 5.4
  Top Layer w0.2: R90.1 25.6,24.9 26.2,24.3 26.2,23.6 26.8,23 27.8,23 28.05,22.75 USBC1.A5
CC2: R91.1 USBC1.B5 | length 9.5
  Top Layer w0.2: R91.1 v1(25.4,24) ; v1(30,20.3) 30.4,20.3 31.05,20.95 USBC1.B5
  Bottom Layer w0.2: v1(25.4,24) 25.4,22.9 28,20.3 v1(30,20.3)
CHRG: D19.2 U2.1 | length 17.9
  Top Layer w0.2: D19.2 26.86,27.2 v1(27.4,27.2) ; v1(38,22.6) U2.1
  Bottom Layer w0.2: v1(27.4,27.2) 26.6,27.2 26.1,26.7 26.1,24.7 28.2,22.6 v1(38,22.6)
D_RXD_1V8: U1.38
D_TXD_1V8: U1.39
DOUT: U1.99
GND: C1.2 C2.2 C3.1 C4.1 C7.1 C9.1 C10.2 C11.1 C14.1 C25.1 C30.2 C31.2 C32.1 C33.1 C35.2 C36.2 C37.2 C38.1 C39.1 C40.1 C54.1 C55.2 C56.1 C57.1 CARD1.8 CARD1.9 CARD1.10 CARD1.11 CARD1.C5 D1.2 D2.2 D3.2 D4.2 D5.2 D6.2 D7.2 D8.2 D9.2 D10.2 D11.2 D12.2 D13.2 D17.2 D18.2 J1.2 J1.3 J2.2 J2.3 J2.4 J3.3 J3.4 J4.0 J4.3 J6.0 J6.2 pad.2@36.4,42.8 Q3.2 Q4.2 Q5.2 R18.2 R39.2 R61.2 R90.2 R91.2 SW1.1 SW1.3 SW1.4 SW2.1 SW2.3 SW2.4 U1.1 U1.10 U1.27 U1.34 U1.36 U1.37 U1.40 U1.41 U1.45 U1.46 U1.47 U1.48 U1.70 U1.71 U1.72 U1.73 U1.89 U1.90 U1.91 U1.92 U1.93 U1.94 U2.2 U3.1 U4.7 U4.15 U5.7 USBC1.0 USBC1.A1 USBC1.A12 USBC1.B1 USBC1.B12
  other v1: 30.4,16.3 48.1,16.3 27.8,16.4 29,16.4 31.8,16.4 26.7,16.7 46.3,16.7 45.7,17.5 45.6,18.7 47.7,18.8 49.2,18.9 50,19.2 52.1,19.6 51,19.7 53.1,19.8 20.3,20.2 21.4,20.3 50.8,20.5 49.9,20.6 20.8,20.9 42.9,21 20.2,21.1 42,21.2 43.9,21.4 36.1,21.7 36.8,21.7 43.1,22.2 23.3,22.4 47.1,22.4 48.6,22.6 50.4,22.6 23.3,23.2 24.1,23.2 47.7,24.4 23.2,24.7 30.9,24.7 27,24.8 27.8,24.8 29.8,24.9 46.7,25 30.4,25.2 22.6,25.3 46.7,25.7 20.3,25.8 34.8,25.9 35.6,25.9 36.4,25.9 56.9,26 47.8,26.1 50.8,26.1 46.7,26.4 27.8,26.5 56.6,26.7 50.8,26.9 56.9,27.5 28.3,27.8 29.4,27.8 32.8,30.1 20.9,30.6 25.1,30.8 20.2,31 23,31 45.5,31 46.8,31 29.8,31.5 23.5,31.6 45.5,31.7 46.8,31.7 27.1,32.9 28.3,33 40.9,33 27.5,33.7 56.8,33.8 51.7,34.1 43.1,34.2 25.2,34.4 56.4,34.4 27.2,34.5 23.5,34.8 24.4,35.3 27.6,35.3 20.3,35.6 28.3,35.6 23.7,35.7 24.8,36 27.7,36 33,36.3 24,36.5 28.3,36.5 29.4,37.1 23.7,37.3 28.6,37.3 33,37.7 29.4,38.1 23.6,38.4 27.7,38.7 28.6,38.7 24.3,38.8 48,38.8 33,39.1 49,39.2 39.1,39.4 40.9,39.4 56.7,39.4 50,39.5 37.7,39.8 50.6,40 54.6,40.1 55.3,40.4 51,40.6 24.9,41.6 34.1,41.8 29.3,41.9 27.5,42 39.1,42 28.4,42.1 25,42.3 25.3,43 33.1,43.3 26,43.5 25.1,43.8 37.3,43.8 21.8,44 52,44.2 33,44.3 51.1,44.3 24.9,44.6 52.9,44.6 21.7,44.8 48,45 45.1,45.2 51.4,45.2 50,45.4 52.2,45.4 24.5,45.5 33,45.5 50.7,45.7 38.5,46.4 39.5,46.4 42.1,46.4 42.9,46.4 43.8,46.4 44.8,46.4 51.4,46.4 52.3,46.8 45.4,46.9 46.2,47.2 47.2,47.2 47.9,47.5 52.3,47.5 25.2,47.7 47.9,48.3 52.3,48.3 25.2,48.6 52.3,49.2 25.2,49.4 38.7,49.5 39.9,49.5 41.2,49.5 42.7,49.5 44,49.5 31.3,49.6 32.6,49.6 34.2,49.6 35.6,49.6 37.1,49.6
I2C0_SCL: U1.67
I2C0_SDA: U1.66
LCD_RS: U1.51 U4.3 | length 21.5
  Top Layer w0.2: U1.51 v1(34.9,37)
  Bottom Layer w0.2: v1(34.9,37) 36.3,37 37.1,36.2 48.6,36.2 49.2,35.6 49.9,35.6 51.6,37.3 52.5,37.3 53.2,36.6 U4.3
LCD_RS_3V3: J6.6 U4.12 | length 3.7
  Top Layer w0.2: J6.6 52.483,30.2 v1(53.6,30.2)
  Bottom Layer w0.2: U4.12 53.199,30.601 v1(53.6,30.2)
LCD_RST: U1.49 U4.2 | length 21.1
  Top Layer w0.2: U1.49 v1(34.9,39.4) ; v1(49,38.2) 50,38.2 51.5,36.7 v1(51.9,36.7)
  Bottom Layer w0.2: v1(34.9,39.4) 35.6,39.4 36.4,38.6 37.2,38.6 38.4,37.4 48.2,37.4 v1(49,38.2) ; v1(51.9,36.7) 52.4,36.7 52.7,36.4 U4.2
LCD_RST_3V3: J6.5 U4.13 | length 5.3
  Top Layer w0.2: v1(51.157,29.143) J6.5
  Bottom Layer w0.2: v1(51.157,29.143) 51.843,29.143 52.698,29.998 U4.13
LCD_SPI_CLK: U1.53 U4.5 | length 25.2
  Top Layer w0.2: U1.53 v1(34.9,34.6) ; v1(48.2,34.8) 48.2,36.7 49.1,37.6 v1(49.6,37.6)
  Bottom Layer w0.2: v1(34.9,34.6) 35.8,34.6 36.6,35.4 47.6,35.4 v1(48.2,34.8) ; v1(49.6,37.6) 50.4,37.6 51.1,38.3 53.2,38.3 54.2,37.3 U4.5
LCD_SPI_CLK_3V3: J6.3 U4.10 | length 7.5
  Top Layer w0.2: J6.3 52.446,26.8 53.4,26.8 53.7,27.1 v1(53.7,27.8)
  Bottom Layer w0.2: v1(53.7,27.8) 54.8,28.9 54.8,30.7 54.199,31.301 U4.10
LCD_SPI_CS: Q12.2 U1.52 | length 30.1
  Top Layer w0.2: U1.52 v1(34.9,35.8) ; v2(48.7,27.4) 48.7,31 49.2,31.5 v1(49.2,34.9)
  Bottom Layer w0.2: v1(34.9,35.8) 48.3,35.8 v1(49.2,34.9) ; v2(48.7,27.4) 49.6,27.4 50,27 50,25.8 50.6,25.2 Q12.2
LCD_SPI_CS_3V3: J6.8 Q12.3 R63.2 | length 11.8
  Top Layer w0.2: J6.8 54.607,32.893 55.3,32.2 55.3,26.6 v1(55.9,26)
  Bottom Layer w0.2: Q12.3 55.4,24.7 55.8,25.1 56.15,25.1 R63.2 56.2,25.7 v1(55.9,26)
LCD_SPI_DOUT: U1.50 U4.4 | length 21.9
  Top Layer w0.2: U1.50 v1(34.9,38.2)
  Bottom Layer w0.2: v1(34.9,38.2) 37,38.2 38.2,37 50.6,37 51.4,37.8 52.8,37.8 53.7,36.9 U4.4
LCD_SPI_DOUT_3V3: J6.4 U4.11 | length 5.2
  Top Layer w0.2: J6.4@52.8,27.9 53.6,28.7 v1(53.6,29.2)
  Bottom Layer w0.2: v1(53.6,29.2) 54.2,29.8 54.2,30.4 53.698,30.902 U4.11
LCD_TE: Q5.1 U1.78 | length 33.2
  Top Layer w0.2: U1.78 v1(36.7,37.6) ; v2(49.3,26.7) 49.3,30.6 49.7,31 49.7,34.3 50.1,34.7 50.1,35.6 v1(49.5,36.2)
  Bottom Layer w0.2: v1(36.7,37.6) 37.7,36.6 49.1,36.6 v1(49.5,36.2) ; v2(49.3,26.7) 49.3,22.8 50.1,22 Q5.1
MAIN_RXD: D16.2 R5.2 U1.17 | length 21.5
  Top Layer w0.2: v1(37.629,32.029) 38,31.658 U1.17 ; v1(43.5,24) D16.2 ; D16.2@44.1,24.1 R5.2@44.1,24.9
  Bottom Layer w0.2: v1(37.629,32.029) 34.629,32.029 34,31.4 34,28.7 35.1,27.6 36.8,27.6 37.4,27 37.4,26 37.8,25.6 39.1,25.6 39.4,25.9 41.6,25.9 v1(43.5,24)
MAIN_TXD: Q6.2 R2.2 U1.18 | length 26.7
  Top Layer w0.2: v1(38.7,32) 39.1,31.6 U1.18 ; v1(42.9,23.5) 43.25,23.15 R2.2 ; R2.2@45.625,23.125 46.425,23.125 Q6.2
  Bottom Layer w0.2: v1(38.7,32) 37.9,32.8 34.5,32.8 33.5,31.8 33.5,28.5 34.8,27.2 36.5,27.2 37,26.7 37,25.7 37.5,25.2 39.3,25.2 39.6,25.5 41.4,25.5 42.875,24.025 42.875,23.525 v1(42.9,23.5)
MIC1N: C13.1 U1.4 | length 5.8
  Top Layer w0.2: C13.1 26.6,41.45 26.5,41.55 26.5,42.3 27.2,43 30.5,43 U1.4@30.9,42.6
MIC1P: C8.1 U1.3 | length 6.6
  Top Layer w0.2: C8.1 25.8,41.45 25.9,41.55 25.9,42.3 27,43.4 30.5,43.4 U1.3@30.9,43.8
NET: Q3.1 U1.16 | length 9.2
  Top Layer w0.2: Q3.1@28.9,31 28.95,31 29.45,30.5 31.2,30.5 32.5,29.2 35.9,29.2 U1.16@36.9,30.2
NetB1_1: B1.1 D5.1 MIC1.2 | length 7.8
  Top Layer w0.2: 20.4,33.8 20.4,32.4 20.6,32.2 ; 23,32.7 24,32.7 D5.1 24.55,32.2 25.05,32.7 25.8,32.7 26.5,33.4 26.5,35.15 26.6,35.25 B1.1
NetB1_2: B1.2 C1.1 C2.1 C5.2 C6.2 C13.2 R17.1 | length 5.2
  Top Layer w0.2: B1.2 C1.1 C2.1 C6.2 ; C13.2 C6.2 ; R17.1 C6.2
NetB2_1: B2.1 D6.1 MIC1.1 | length 6.6
  Top Layer w0.18: MIC1.1 23.996,33.096 D6.1
  Top Layer w0.2: D6.1 24.55,33.6 25.05,33.1 25.5,33.1 25.9,33.5 25.9,35.15 25.8,35.25 B2.1
NetB2_2: B2.2 C3.2 C4.2 C5.1 C6.1 C8.2 R19.2 | length 5.2
  Top Layer w0.2: R19.2 C6.1 ; B2.2 C3.2 C4.2 C8.2
NetB3_1: B3.1 U5.8 | length 1.9
  Bottom Layer w0.4: U5.8@49.2,40.2 49.3,40.2 50.15,41.05 B3.1
NetB4_1: B4.1 U5.5 | length 2
  Bottom Layer w0.4: U5.5@49.3,44.1 50.15,43.25 B4.1
NetC11_2: C11.2 U5.2 | length 1.6
  Bottom Layer w0.4: C11.2 42.65,41.483 U5.2@44.182,41.483
NetC12_1: C12.1 R23.2 U5.3 | length 2
  Bottom Layer w0.3: R23.2 U5.3@43.8,42.9
NetC12_2: C12.2 R24.2 U5.4 | length 2.1
  Bottom Layer w0.3: R24.2 43.8,43.8 U5.4@43.9,43.9
NetC24_1: C24.1 R17.2 R18.1 | length 8.2
  Top Layer w0.4: C24.1 23.15,39.95 v1(23.4,39.7) ; R18.1 R17.2 v1(29,39.7)
  Bottom Layer w0.4: v1(23.4,39.7) v1(29,39.7)
NetC24_2: C24.2 R19.1 R20.2 | length 1.8
  Top Layer w0.4: R19.1 C24.2 R20.2
NetC26_2: C26.2 R23.1 | length 0.8
  Bottom Layer w0.2: C26.2 R23.1
NetC27_2: C27.2 R24.1 | length 0.8
  Bottom Layer w0.2: C27.2 R24.1
NetC53_2: C53.2 Q12.1 R62.2 | length 1.8
  Bottom Layer w0.2: R62.2 52.325,24.175 54.025,24.175 Q12.1
NetD1_1: D1.1 J1.1 U1.35 | length 3.7
  Top Layer w0.9: U1.35 48.418,46 ccw(c48.418,48.373) J1.1@50.096,46.695
NetD14_1: D14.1 R11.1 | length 1.7
  Top Layer w0.2: R11.1 24.05,29.25 24.7,28.6 25.14,28.6 D14.1
NetD14_2: D14.2 Q3.3 | length 3.6
  Top Layer w0.2: D14.2 27.8,29.54 Q3.3@27.8,31.5
NetD15_1: D15.1 R13.1 | length 1.3
  Top Layer w0.2: R13.1 24.9,30.2 D15.1@25.2,29.9
NetD15_2: D15.2 Q4.3 | length 2.1
  Top Layer w0.2: Q4.3@25.5,31.5 26,31 26,30.5 D15.2@26.6,29.9
NetD19_1: D19.1 R7.1 | length 1.3
  Top Layer w0.3: R7.1 24.8,26.6 24.94,26.6 D19.1
NetR21_1: R21.1 R22.2 U5.1 | length 2.5
  Bottom Layer w0.3: R22.2 R21.1 42.652,40.198 44.198,40.198 U5.1
NetR39_1: R39.1 U2.6 | length 1
  Top Layer w0.3: R39.1 U2.6@36.15,22.65
  Top Layer w0.4: U2.6@36.15,22.65 U2.6
NetR60_2: R60.2 R61.1 U4.8 | length 3.1
  Bottom Layer w0.4: U4.8 55.449,30.251 55.45,30.25 R60.2
PIN19: C38.2 SW1.2 U1.19 | length 21.4
  Top Layer w0.2: SW1.2 22.6,27.5 22.8,27.5 C38.2 v1(23.3,28.1) ; v1(27.8,28.5) 27.8,28.8 28.9,29.9 31.1,29.9 32.2,28.8 36.2,28.8 37,29.6 39.45,29.6 40.2,30.35 U1.19
  Bottom Layer w0.2: v1(23.3,28.1) 27.4,28.1 v1(27.8,28.5)
PIN20: R6.1 U1.20 | length 35.8
  Top Layer w0.2: v1(22.5,44.4) 22.9,44.8 23.8,44.8 24.25,44.35 R6.1 ; v1(29.3,29.3) 31.1,29.3 32,28.4 36.4,28.4 37.2,29.2 40.15,29.2 U1.20@41.3,30.35
  Bottom Layer w0.2: v1(22.5,44.4) 22.5,41.9 22.7,41.7 22.7,33.9 24.9,31.7 27.8,31.7 29.3,30.2 v1(29.3,29.3)
PIN21: Q4.1 U1.21 | length 19.6
  Top Layer w0.2: Q4.1@26.6,31.2 v1(27.2,30.6) ; v1(29.2,28.6) 31.2,28.6 31.9,27.9 40.5,27.9 42.4,29.8 U1.21
  Bottom Layer w0.2: v1(27.2,30.6) 28.1,30.6 28.7,30 28.7,29.1 v1(29.2,28.6)
PIN25: U1.25
PIN29: R22.1 U1.29 | length 6
  Top Layer w0.2: v1(45,39.4) U1.29
  Bottom Layer w0.2: R22.1 41.75,38.65 42,38.4 43.2,38.4 44.2,39.4 v1(45,39.4)
PWRKEY: C14.2 R6.2 SW2.2 U1.7 | length 14.8
  Top Layer w0.2: SW2.2 22.4,42.5 C14.2 R6.2 v1(23.35,44.1) ; v1(29.3,40.8) 30.6,39.5 U1.7@32.1,39.5
  Bottom Layer w0.2: v1(23.35,44.1) 23.35,41.85 24.4,40.8 v1(29.3,40.8)
RXD2: D16.1 D17.1 J4.1 | length 4.3
  Top Layer w0.2: D16.1@44.1,22.5 46.1,22.5 46.4,22.2 D17.1 46.4,20.547 J4.1
SIM_CLK: CARD1.C3 D11.1 U1.13 | length 22.6
  Top Layer w0.2: U1.13 39.4,32.8 v1(41,34.4)
  Bottom Layer w0.2: v1(41,34.4) 41.7,34.4 42.5,33.6 46.95,33.6 49.7,30.85 D11.1 49.7,28.64 CARD1.C3
SIM_DATA: CARD1.C7 D10.1 R1.2 U1.11 | length 23.6
  Top Layer w0.2: U1.11 32.3,35 33.6,33.7 37,33.7 38.2,34.9 39.5,34.9 v1(40.1,34.3)
  Top Layer w0.3: R1.2 U1.11
  Bottom Layer w0.2: v1(40.1,34.3) 40.7,33.7 41.6,33.7 42.4,32.9 46.7,32.9 48.4,31.2 D10.1 48.4,28.61 CARD1.C7
SIM_DET: CARD1.CD D9.1 R3.1 U1.79 | length 22.5
  Top Layer w0.2: U1.79 36.05,36.4 37,35.45 v1(37,34.7) ; v2(44,27.1) 45.1,28.2 45.6,28.2 46.05,28.65 R3.1
  Bottom Layer w0.2: v1(37,34.7) 37.9,33.8 38.3,33.8 38.5,33.6 40,32.1 40,31.4 39.5,30.9 39.5,28.2 39.9,27.8 40.4,27.8 ; CARD1.CD CARD1.CD@42.2,28.7 ; CARD1.CD@42.2,28.81 CARD1.CD@42.2,28.7 ; CARD1.CD@42.212,28.688 CARD1.CD@42.2,28.7 ; v2(44,27.1) 41.1,27.1 40.4,27.8 ; 40.4,27.8 41,28.4 41,29.4 D9.1 41.6,29.8 41.6,29.3 CARD1.CD@42.2,28.7
SIM_RST: CARD1.C2 D12.1 U1.12 | length 20.3
  Top Layer w0.2: U1.12 32.7,33.9 33.3,33.3 37.5,33.3 v1(38.5,34.3)
  Bottom Layer w0.2: v1(38.5,34.3) 40.4,32.4 45.7,32.4 46.1,32 D12.1 46.7,29.9 47.06,29.54 CARD1.C2
SIM_VDD: C35.1 CARD1.C1 D13.1 R1.1 U1.14 | length 24.6
  Top Layer w0.4: C35.1 R1.1 29.15,33.25 30.6,31.8 32.5,31.8 32.9,31.4 U1.14@34.7,31.4 ; v2(34.7,29.8) U1.14 ; v2(37.3,28.5) v2(40.1,28.5)
  Bottom Layer w0.4: v2(34.7,29.8) 36,28.5 v2(37.3,28.5) ; v2(40.1,28.5) 40.3,28.7 40.3,30.6 41,31.3 43.3,31.3 44,30.6 D13.1 44,29.4 CARD1.C1@44.6,28.8
SN: B4.2 C28.1 C29.1 C32.2 C33.2 D7.1 J3.1 | length 15.2
  Top Layer w0.4: D7.1@51.3,38.75 D7.1 ; J3.1 52.2,40.4 51.7,39.9 51.3,39.5 D7.1 ; v2(56.4,41.6) 56.4,40.4 55.4,39.4 52.802,39.4 52.202,38.8 52.2,38.8 D7.1
  Bottom Layer w0.4: B4.2 C32.2 C33.2 55.5,42.5 v2(56.4,41.6)
SP: B3.2 C28.2 C29.2 C30.1 C31.1 D8.1 J3.2 | length 12.3
  Top Layer w0.4: J3.2@52.1,41.7 51.3,42.5 D8.1 52.4,43.3 52.801,42.899 53,42.7 55,42.7 55.6,42.1 v2(55.6,41.2)
  Bottom Layer w0.4: B3.2 C28.2 C29.2 55.2,41.6 v2(55.6,41.2)
SPK_N: C27.1 U1.6 | length 10
  Top Layer w0.2: U1.6 32.8,40.5 33.5,41.2 34.5,41.2 34.9,41.2 36,42.3 38.3,42.3 38.8,42.8 38.8,43.5 v1(38.5,43.8)
  Bottom Layer w0.2: v1(38.5,43.8) C27.1
SPK_P: C26.1 U1.5 | length 8.2
  Top Layer w0.2: U1.5 32.7,41.6 33.5,42.4 35,42.4 35.5,42.9 v1(38.1,42.9)
  Bottom Layer w0.2: v1(38.1,42.9) C26.1
STDBY: U2.5
TXD2: D18.1 J4.2 Q6.3 R4.2 | length 4.2
  Top Layer w0.2: Q6.3 47.8,23.6 47.95,23.45 47.95,23.4 48.1,23.25 R4.2 ; J4.2 47.8,20.424 D18.1 Q6.3@47.8,23.55
USB_BOOT: pad.2@35.2,42.8 U1.82 | length 12.2
  Top Layer w0.2: v1(36.9,41.6) 36.9,39.1 37.5,38.5 41.5,38.5 42.3,37.7 U1.82
  Bottom Layer w0.2: pad.2@35.2,42.8 35.2,42.4 36,41.6 v1(36.9,41.6)
USB_DM: D3.1 U1.60 USBC1.A7 USBC1.B7 | length 31.2
  Top Layer w0.2: D3.1@28.1,23.6 28.55,23.15 USBC1.B7@28.55,22.123 ; D3.1 28.1,23.75 28.6,24.25 28.6,26 29.6,27 40.9,27 43.5,29.6 43.5,32.1 42.1,33.5 42.1,34.7 42.7,35.3 43.5,35.3 U1.60@43.8,35.6 ; USBC1.B7 28.55,20.95 28.7,20.8 29.4,20.8 29.55,20.95 USBC1.A7
USB_DP: D2.1 U1.59 USBC1.A6 USBC1.B6 | length 30.3
  Top Layer w0.2: USBC1.A6@29.05,22.123 29.05,23.05 D2.1@29.65,23.65 ; USBC1.B6 30.05,22.85 29.7,23.2 29.7,23.6 D2.1@29.65,23.65 ; U1.59@43.9,34.5 43.5,34.9 42.9,34.9 42.5,34.5 42.5,33.7 43.9,32.3 43.9,29.4 41.1,26.6 29.8,26.6 29,25.8 29,24.35 29.6,23.75 D2.1 D2.1@29.65,23.65 ; U1.59@43.9,34.7 U1.59@44.1,34.5
VBAT: C7.2 C10.1 C36.1 C37.1 C39.2 J2.1 R7.2 R11.2 R13.2 R21.2 U1.42 U1.43 U2.3 U3.3 U5.6 | length 46.6
  Top Layer w0.2: R11.2@23.15,29.15 24.2,28.1 R7.2
  Top Layer w0.3: v1(22.5,28.9) 22.8,29.2 23.1,29.2 23.15,29.25 R11.2 R13.2 ; v2(23.4,25.7) v2(27.3,25.7)
  Top Layer w0.5: 29.1,45.1 C37.1 ; v1(40.8,24.2) 41.5,24.2 43.7,26.4 44.5,26.4 U3.3@45.8,26.4 ; v2(41,41.5) 42.3,41.5 43.2,40.6 43.2,39.4 44.1,38.5 v2(45.2,38.5) ; U3.3@45.49,26.265 U3.3
  Bottom Layer w0.3: v1(22.5,28.9) 22.5,26.6 v2(23.4,25.7) ; v2(27.3,25.7) 29.7,25.7 30.8,26.8 ; v2(41,41.5) 41,40.5 41.3,40.2 R21.2
  Bottom Layer w0.5: 31.9,40.8 39.6,40.8 40.3,41.5 v2(41,41.5) ; v2(45.2,38.5) 45.9,38.5 C10.1 46.4,42 47.135,42.735 U5.6
  other v1: 38,21.3 38.6,21.6 39.5,21.7 40,23.5 40.8,23.5 40,24.2 26.1,44.9 26.9,44.9 27.9,44.9 25.7,45.6 25.7,46.3
VBUS: C9.2 D4.1 U1.61 U2.4 USBC1.A4 USBC1.A9 USBC1.B4 USBC1.B9 | length 19
  Top Layer w0.3: U2.4 36.45,24.5 37.65,25.7 41.5,25.7 44.9,29.1 44.9,33.3 45.2,33.6 45.2,36.1 U1.61@44.4,36.9 ; U1.61@44.1,36.9 U1.61@44.2,36.8
VCC_3V3: C40.2 C55.1 C56.2 C57.2 J6.1 R4.1 R63.1 U3.2 U4.14 | length 27.6
  Top Layer w0.4: U3.2@47.803,27.103 C40.2@48.75,26.155 ; R4.1 C56.2 C57.2 ; C40.2 49.65,26.05 ; v1(50.9,31.8) 50.89,31.79 50.89,31.09 50,30.2 50,26.4 49.65,26.05 ; v1(52.1,20.6) 51.3,21.4 51.3,23 51.7,23.4 51.7,23.943 J6.1@51.9,24.143 ; J6.1 J6.1@51.9,24.143 ; 49.65,26.05 50.4,25.3 C57.2 ; C57.2 50.75,24.15 50.757,24.143 J6.1@51.9,24.143
  Bottom Layer w0.4: v1(50.9,31.8) C55.1 51.55,32.35 51.784,32.584 U4.14@51.784,33.24 ; v1@52.09,20.59 v1(52.1,20.6) 54.8,20.6 56.2,22 R63.1
VDD_EXT: C25.2 C53.1 C54.2 Q6.1 R2.1 R3.2 R5.1 R20.1 R60.1 R62.1 U1.24 U4.1 | length 91.3
  Top Layer w0.4: v2(22.1,41) 22.6,41.5 R20.1 ; R5.1@45,24.9 R5.1 v2(45,24.1) Q6.1 ; U1.24@46.6,33.8 U1.24@46.908,33.8 ; v2@52.327,22.7 v2(52.3,22.7) 52.7,23.1 53.5,23.1 54.4,24 54.4,24.7 53.9,25.2 v1(53.9,26.2)
  Top Layer w0.5: v2(45.9,27.4) 46.3,27.4 46.95,28.05 R3.2 C25.2 ; U1.24 v2(48.4,33.9) 48.4,32.7 47.7,32 47.7,30.4 C25.2@47,29.7 ; v2(50.9,35.6) 51.6,35.6 53.2,34 55.2,34 56.1,33.1 v2(56.1,29.1)
  Bottom Layer w0.4: v2(22.1,41) 22.1,30.1 21.8,29.8 21.8,22 25.1,18.7 42.6,18.7 45,21.1 v2(45,24.1) ; v2(52.3,22.7) R62.1 C53.1 ; v1(53.9,26.2) 54.8,27.1 55.5,27.1 56.1,27.7 v2(56.1,29.1) 56.35,29.35 R60.1
  Bottom Layer w0.5: v2(45,24.1) 45.9,25 v2(45.9,27.4) ; v2(48.4,33.9) 49.4,33.9 50.45,34.95 C54.2 ; v2(50.9,35.6) C54.2 ; 51.8,34.95 C54.2
pads on no net: CARD1. CARD1.C6 SW1.0 SW2.0 U1.2 U1.8 U1.9 U1.15 U1.28 U4.6 U4.9 USBC1. USBC1.A8 USBC1.B8

## Polygon pours and split planes (outlines as drawn)
GND on Top Layer "GND_L01_P000" (solid, remove dead copper, pour order 0): 19.7,45.7 24.1,50.1 53,50.1 57.4,45.7 57.4,19.8 52.3,14.7 24.9,14.7 19.7,19.9 19.7,20.6
GND on Bottom Layer "GND_L02_P001" (solid, remove dead copper, pour order 1): 19.7,45.7 24.1,50.1 53,50.1 57.4,45.7 57.4,19.8 52.3,14.7 24.9,14.7 19.7,19.9 19.7,20.6

## Keep-outs
Keep-Out Layer:
  the board outline again, w0.1

## Other copper
Top Layer:
  region net VBUS: 31.9,24.4 32.5,25 33.4,25 33.4,23.8 32.3,22.7 31.9,22.7
  region net VBUS: 26.6,22.5 27.2,22.5 27.2,21 28.5,19.7 30.3,19.7 31.4,20.8 31.4,22.8 31.9,23.3 31.9,24 32,24.1 32.4,24.1 32.5,24 32.5,22.9 32.3,22.7 32.1,22.7 32,22.6 32,20.8 30.4,19.2 28.3,19.2 26.6,20.9 26.6,21.2
  region net VBAT: 37,19.2 37,21 38.1,22.1 39.4,22.1 39.6,22.3 39.6,23.9 39.5,24 38.4,24 38.2,24.2 38.2,24.8 38.3,24.9 40.6,24.9 41.2,24.3 41.2,21.8 40.6,21.2 38.7,21.2 38.4,20.9 38.4,19.2 38.2,19 37.2,19
  region net VBUS: 33.1,25 36,25 36.325,24.675 36.325,24.425 35.9,24 34.4,24 34.2,23.8 33.1,23.8
  region net VBAT: 29,46.9 31.1,49 37,49 37.4,48.6 37.4,47.1 37,46.7 30.8,46.7 29.9,45.8 29.9,45 29.4,44.5 25.9,44.5 25.2,45.2 25.2,46.4 25.7,46.9
Bottom Layer:
  region net VBAT: 38.7,23.7 38.7,22.5 37.6,21.4 37.6,21.1 37.9,20.8 39.7,20.8 41.2,22.3 41.2,23.7
  region net VBAT: 25.7,46.9 29,46.9 30.7,45.2 30.7,44.5 30.2,44 26.4,44 25.2,45.2 25.2,46.4
  region net VBAT: 40.9,24.6 41.2,24.3 41.2,23.4 40.5,22.7 38.9,22.7 38.5,23.1 33.5,23.1 30.3,26.3 30.3,42.2 28.5,44 28.5,45.4 28.8,45.7 30.2,45.7 32.3,43.6 32.3,27.3 35,24.6

## Silkscreen, mask and mechanical layers (free items; w line width, h text height)
Top Overlay:
  text "S2" at 22.4,44.418 h1.5
  text "SPK" at 48.1,40.422 h1.8
  text "MIC" at 20.6,35.317 h1.5
  text "LCD" at 49.1,33.82 h1.8
  text "USER" at 27.8,29.414 h1.2
  text "NET" at 27.9,28 h1.2
  text "Audio" at 34.1,27.022 h2.2
  text "CRG" at 27.9,26.714 h1.2
  text "UART" at 49.3,21.317 h1.4
  text "S1" at 22.4,21.218 h1.5
  text "BAT" at 40,20.2 h1.4
  text "R" at 43.6,20.2 h1.4
  text "+" at 35.2,19.915 h2
Bottom Overlay:
  text "Audio CORE V1.1" at 28.074,41.4 h2.2 r90
  text "EN" at 40.8,39.9 h1
  text "NC" at 40.8,39.011 h1
Top Solder:
  text "LTE" at 45.2,48.7 h1.8